# Altium PCB Version_2.PcbDoc
Units mm, origin at the board's own origin, x right, y up, seen from the top; angles counter-clockwise.
Board outline 53.21 x 55.37 mm, 4 copper layers (Top Layer, GND, POWER, Bottom Layer), stack 1.383 mm thick; 36 components, 29 nets, 151 pads, 15 vias.
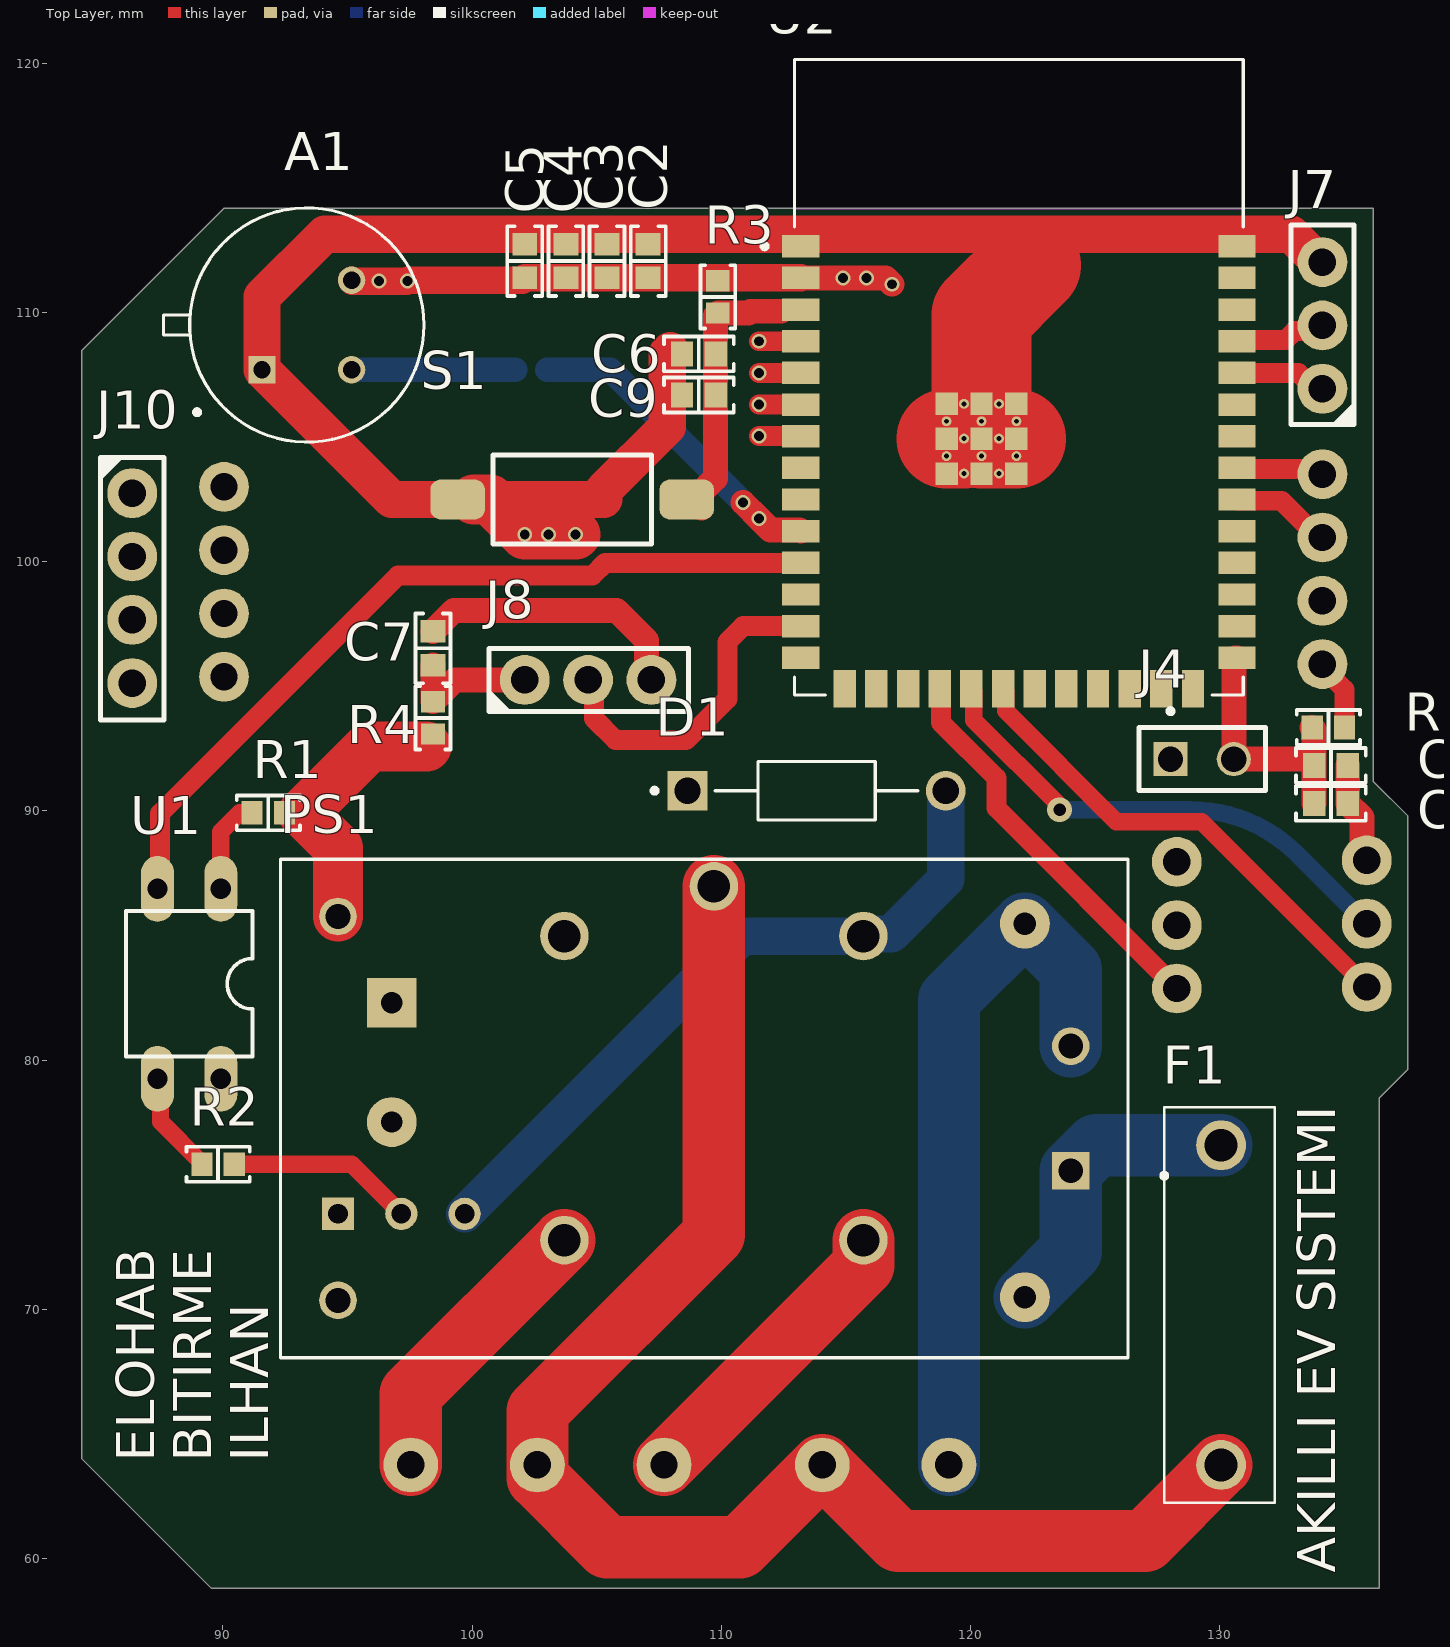
[diagram p0: Top Layer view]
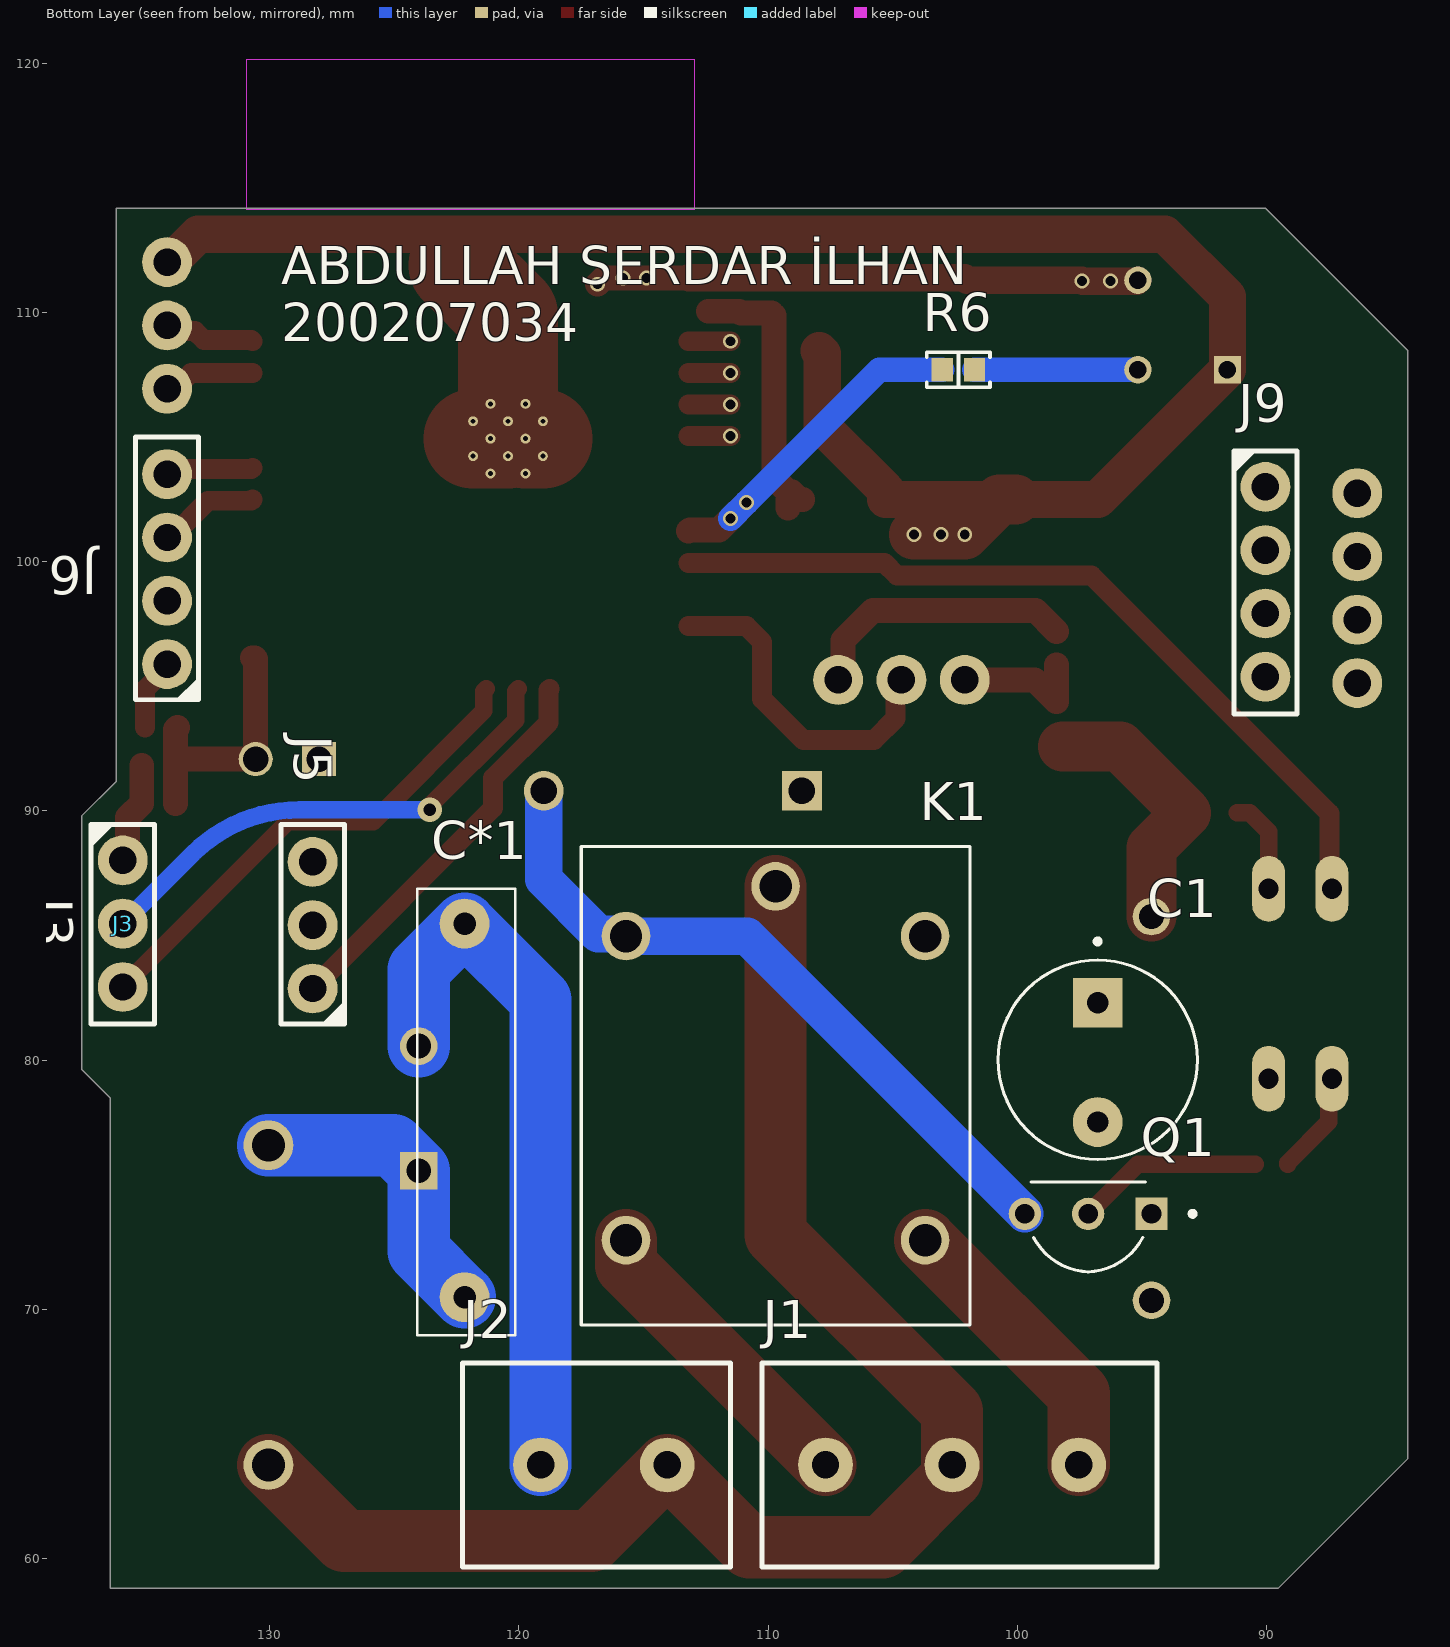
[diagram p1: Bottom Layer view, seen from below]
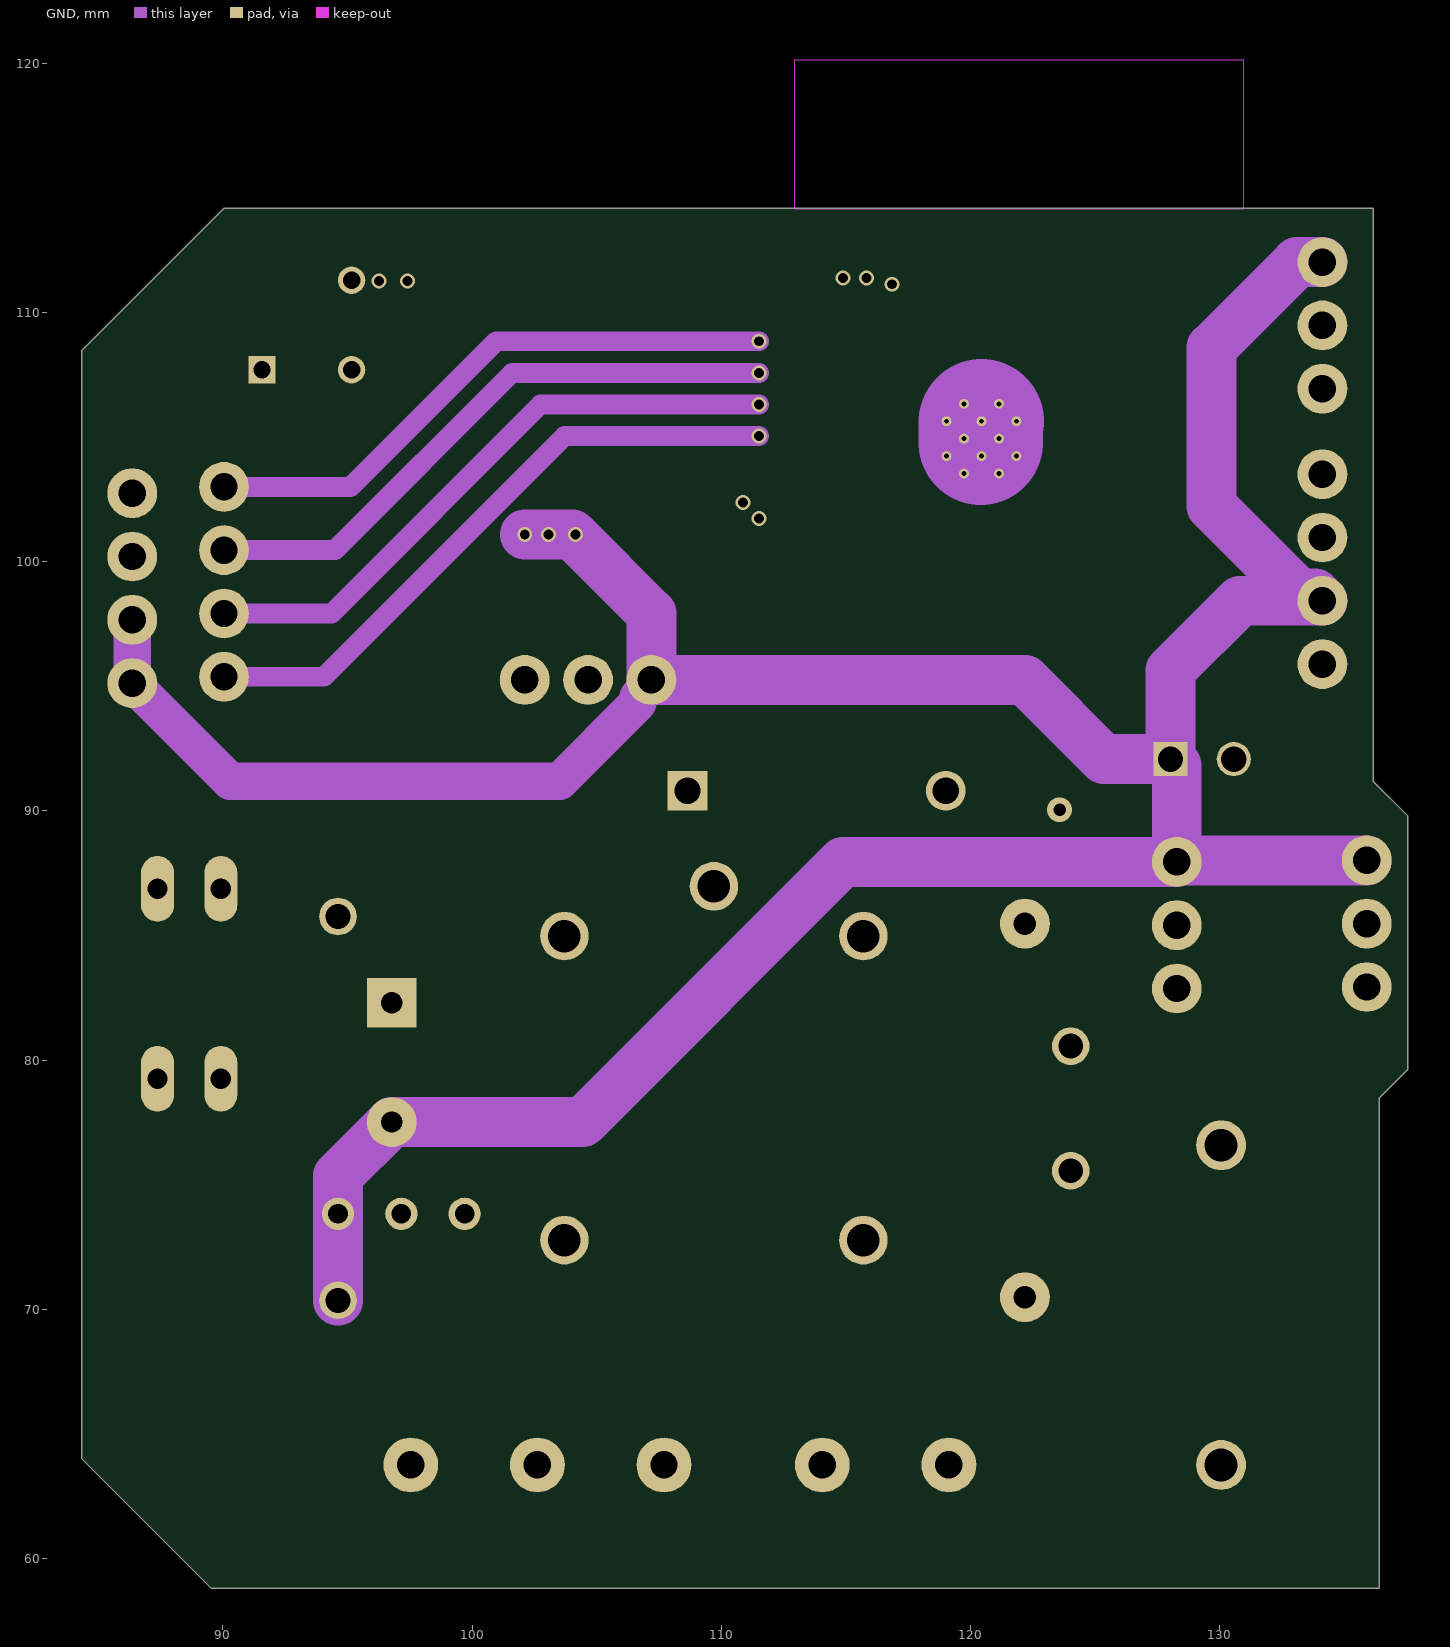
[diagram p2: GND]
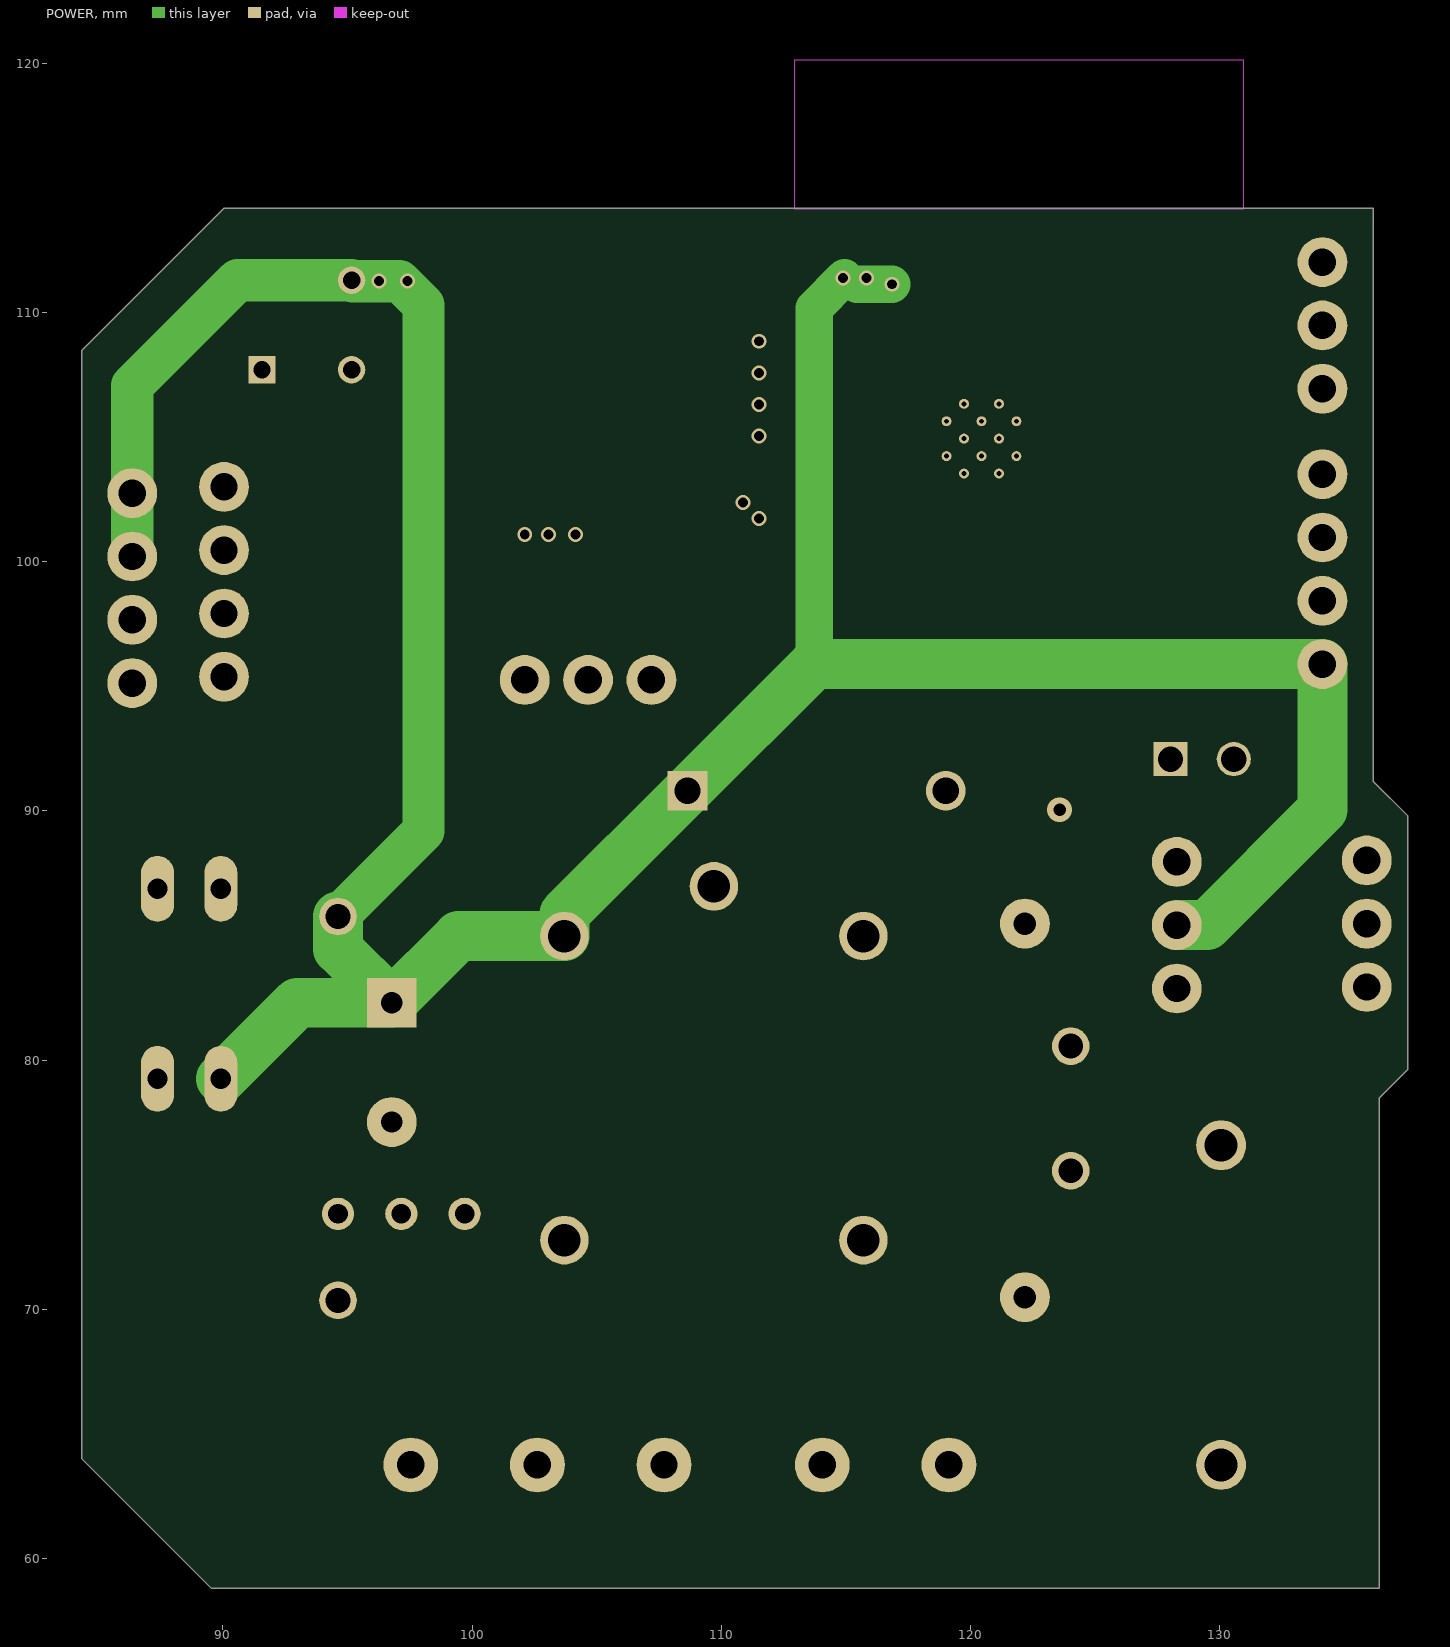
[diagram p3: POWER]
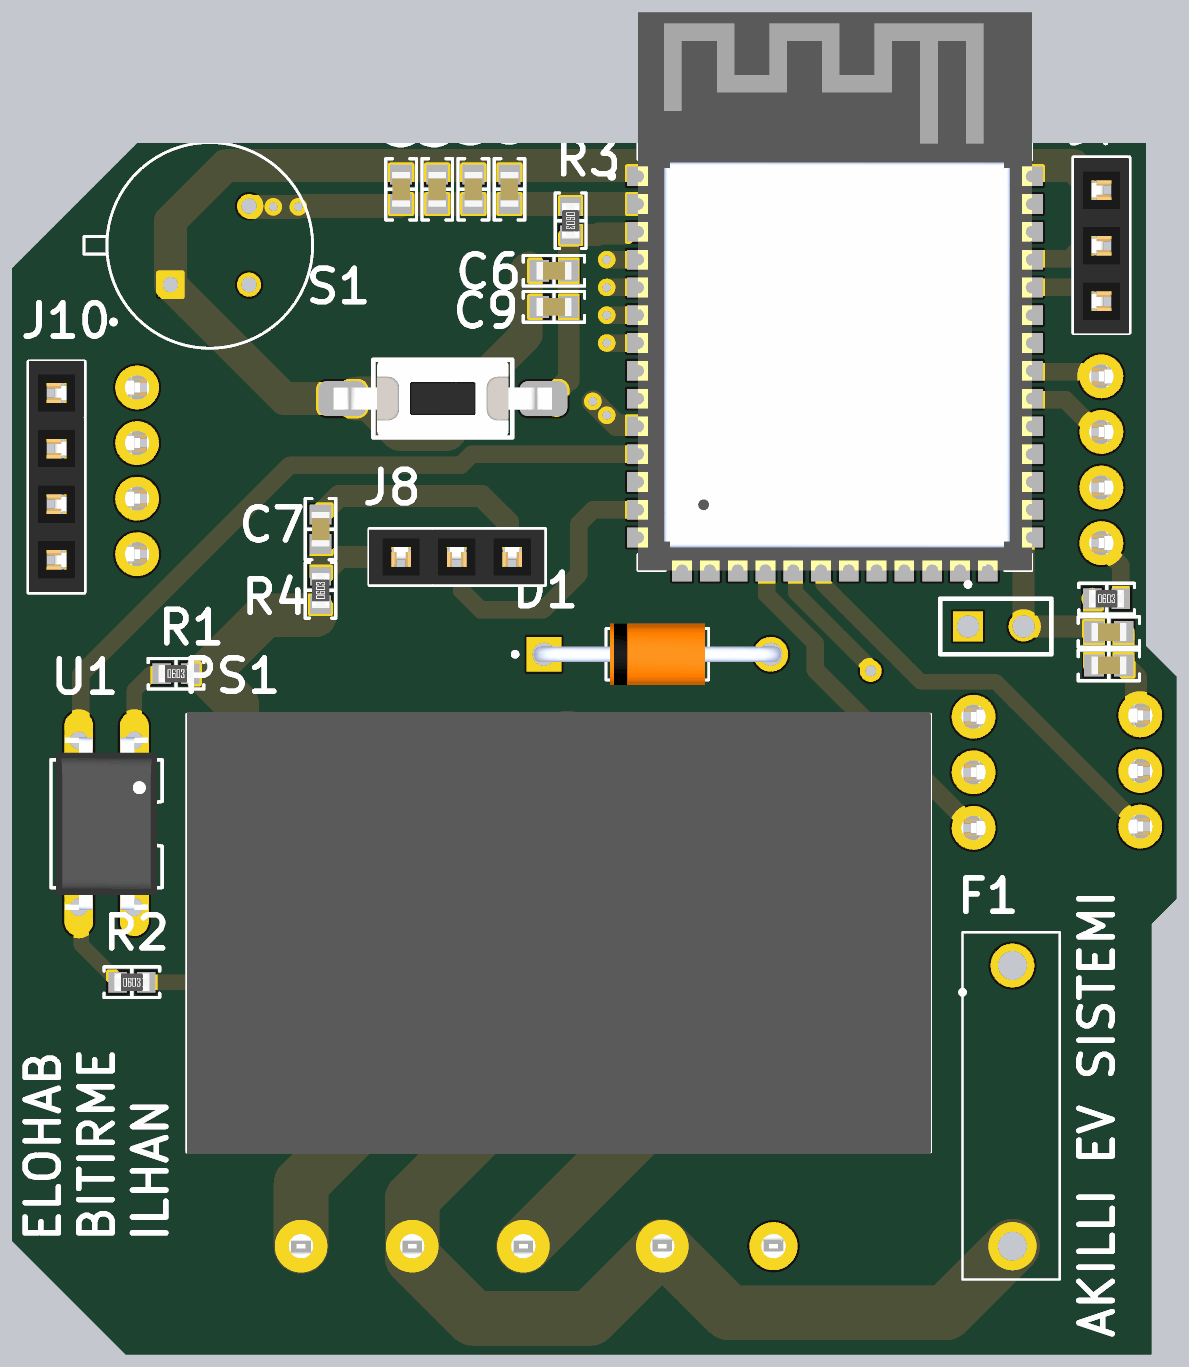
[diagram p4: 3D render of the assembled board from above, using the file's embedded part models]
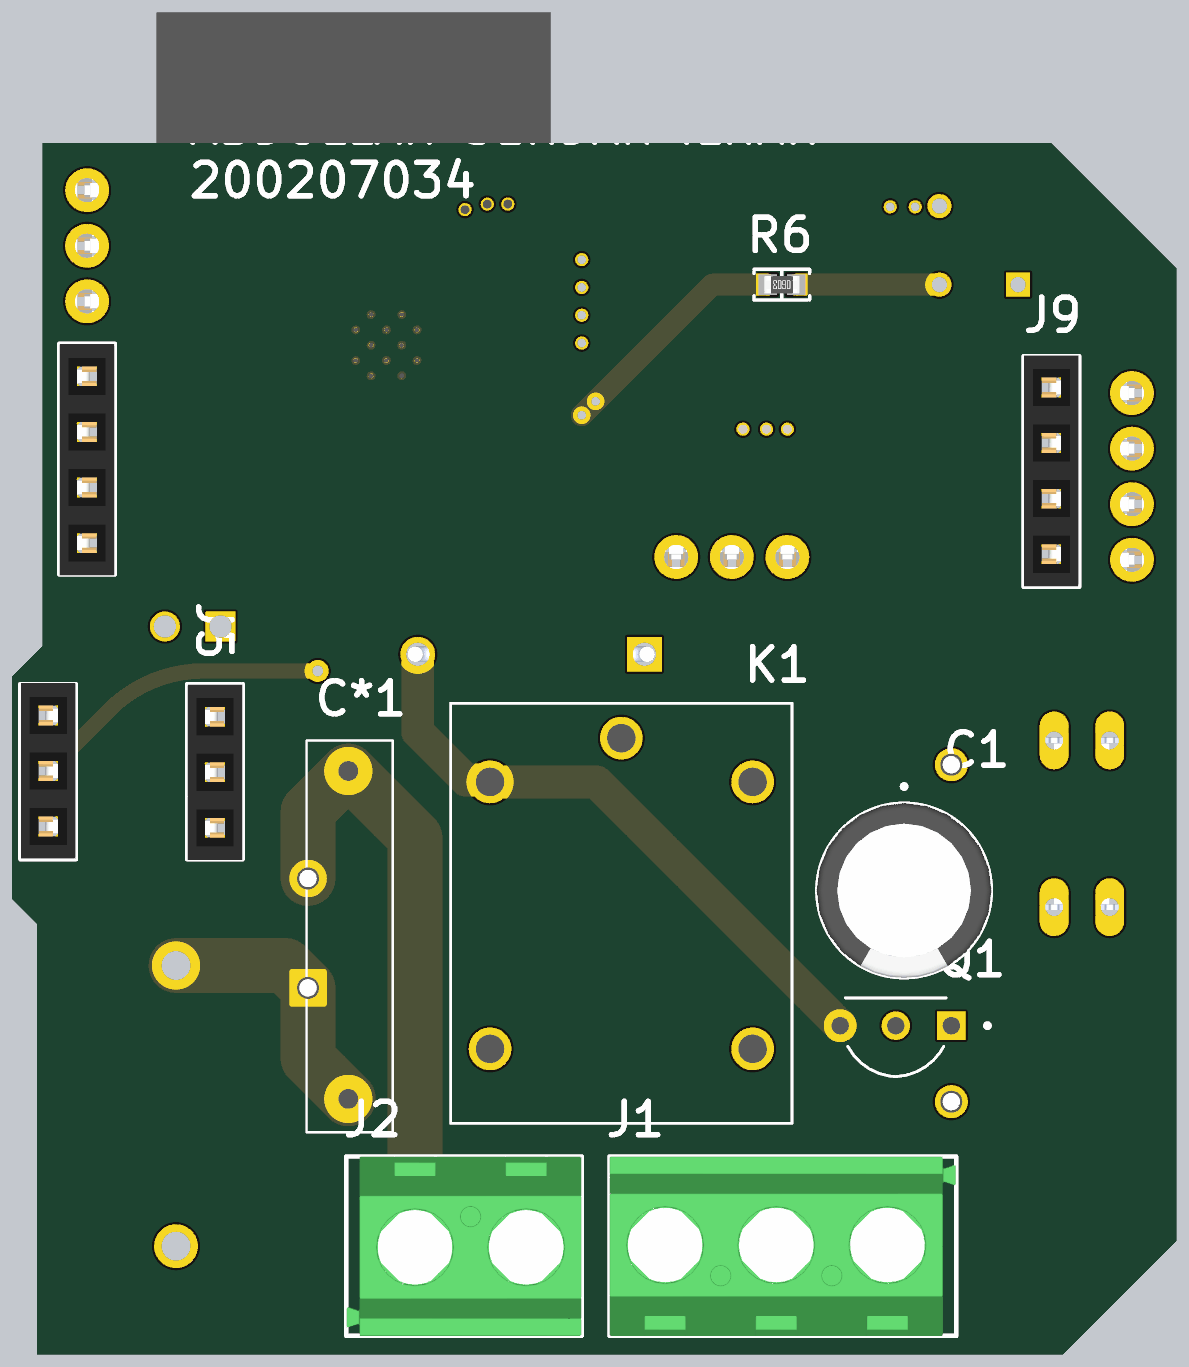
[diagram p5: 3D render of the assembled board from below, using the file's embedded part models]

## Layer stack, top to bottom
Top Solder: solder mask 0.0102, Solder Resist, Dk 3.5
Top Layer: signal copper 0.0356
Dielectric 2: prepreg 0.0711, PP-006, Dk 4.1
GND: signal copper 0.035
Dielectric 1: dielectric 1.1, FR-4, Dk 4.8
POWER: signal copper 0.035
Dielectric 3: prepreg 0.0711, PP-006, Dk 4.1
Bottom Layer: signal copper 0.0356
Bottom Solder: solder mask 0.0102, Solder Resist, Dk 3.5

## Board outline
84.328,64.008 84.328,99.695 84.328,108.458 90.043,114.173 136.144,114.173 136.144,91.186 137.541,89.789 137.541,79.629 136.398,78.486 136.398,58.801 89.535,58.801

## Design rules (kind name [scope] priority, off if disabled: settings)
Clearance [All] p1: gap=0.254 ignorepadtopadclearanceinfootprint=FALSE except(0: Arc-Hole Track-Hole SMDPad-Hole THPad-Hole Via-Hole Fill-Hole Poly-Hole Region-Hole Text-Hole)
PolygonConnect [All] p1: connectstyle=Relief reliefconductorwidth=0.254 reliefentries=4 polygonreliefangle="90 Angle" airgapwidth=0.254
RoutingVias [All] p1: holewidth=0.711 width=1.27 viastyle="Through Hole" minholewidth=0.711 minwidth=1.27 maxholewidth=0.711 maxwidth=1.27
SolderMaskExpansion [All] p1: expansion=0.102 istentingtop=FALSE
Width [All] p1: maxlimit=5 minlimit=0.254 preferedwidth=0.254 minimp=50.000000 maximp=50.000000 favimp=50.000000
30 further rules are at their usual default settings.

## Components (designator, comment, footprint, x,y, rotation, side; value= is the part's Value field where it differs from the comment)
A1 "IRA-S410ST01_1" "TO254P940H490-3 - duplicate" 93.363,109.492 r0 top
C1 "EEUFS2A330B" CAPPRD500W60D800H1150 96.774,80.01 r270 bottom
C2 "1 µF" "CAP 0603_1608" 107.061,112.054 r90 top
C3 "1 µF" "CAP 0603_1608" 105.41,112.054 r90 top
C4 "1 µF" "CAP 0603_1608" 103.759,112.054 r90 top
C5 "1 µF" "CAP 0603_1608" 102.108,112.054 r90 top
C6 "1 µF" "CAP 0603_1608" 109.093,108.331 r0 top
C7 "1 µF" "CAP 0603_1608" 98.425,96.52 r90 top
C8 "1 µF" "CAP 0603_1608" 134.453,91.821 r180 top
C9 "1 µF" "CAP 0603_1608" 109.093,106.68 r0 top
C10 "1 µF" "CAP 0603_1608" 134.453,90.297 r0 top
C*1 "Capacitance_Filter" Capacitance_Filter 122.301,78.486 r90 bottom
D1 "1N4001G" DIOAD1036W78L470D235 113.819,90.805 r0 top
F1 "Fuse 4x11" "Fuse 4x11" 129.921,69.088 r90 top
J1 "282837-3" "TE 282837-3" 102.616,63.754 r180 bottom
J2 "282837-2" "TE 282837-2" 116.586,63.754 r0 bottom
J3 "M20-7820342" "HARWIN M20-7820345" 135.89,85.471 r180 bottom
J4 "TSW-101-23-T-D" SAMTEC_TSW-101-23-T-D 128.016,92.075 r270 top
J5 "M20-7820342" "HARWIN M20-7820345" 128.27,85.411 r0 bottom
J6 "M20-7820442" "HARWIN M20-7820445" 134.112,99.695 r0 bottom
J7 "M20-7820342" "HARWIN M20-7820345" 134.112,109.474 r180 top
J8 "M20-7820342" "HARWIN M20-7820345" 104.648,95.25 r90 top
J9 "M20-7820442" "HARWIN M20-7820445" 90.043,99.187 r180 bottom
J10 "M20-7820442" "HARWIN M20-7820445" 86.36,98.933 r0 top
K1 "SRD-03VDC-SL-C" RELAY_SRD-03VDC-SL-C 109.697,78.971 r270 bottom
PS1 "HLK-PM03" CONV_HLK-PM03 109.315,78.058 r180 top
Q1 "2N2222A" TO92254P470H750-3 97.155,71.501 r0 bottom
R1 "1 kOhms" "RES 0603_1608" 91.821,89.916 r0 top
R2 "1 kOhms" "RES 0603_1608" 89.804,75.819 r0 top
R3 "10 kOhms" "RES 0603_1608" 109.855,110.617 r270 top
R4 "10 kOhms" "RES 0603_1608" 98.425,93.726 r90 top
R5 "10 kOhms" "RES 0603_1608" 134.351,93.345 r0 top
R6 "30 kOhms" "RES 0603_1608" 102.362,107.696 r0 bottom
S1 "FSMSM" "TE FSMSMTR" 104.013,102.489 r270 top
U1 "PC817X3NSZ9F" DIL04 88.646,83.058 r180 top
U2 "ESP32-S3-WROOM-1-N16R2" XCVR_ESP32-S3-WROOM-1-N16R2 121.933,107.389 r0 top

## Footprints (in the part's own frame and the unit in brackets; to place one, negate y for a bottom-side part, rotate by r counter-clockwise, add the part's x,y. Pads: shape width x height; smd on the part's side, far side on the other; paste and mask are expansions set on the pad)
"CAP 0603_1608" [mm] "Chip Capacitor, 2-Leads, Body 1.60x0.80mm, IPC Medium Density"
  rect 0.9x1 smd: 1(-0.675,0) 2(0.675,0)
  silkscreen extent -1.4,-0.7 1.4,0.7, body extent -0.8,-0.41 0.8,0.41, height 0.82
Capacitance_Filter [mm]
  round 2 hole 0.9: 1(-8.001,-0.127) 2(6.985,-0.127)
  silkscreen extent -9.53,-2.16 8.38,1.78
CAPPRD500W60D800H1150 [mm]
  round 2 hole 0.85: N(2.5,0)
  rect 2x2 hole 0.85: P(-2.286,0)
  silkscreen extent -4.85,-4 4,4, body extent -4,-4 4,4, height 11.5
CONV_HLK-PM03 [mm]
  rect 1.508x1.508 / inner round 1.508 / far side rect 1.508x1.508 hole 1: 1(-14.7,2.5)
  round 1.508 hole 1: 2(-14.7,-2.5) 3(14.7,7.7) 4(14.7,-7.7)
  silkscreen extent -18.55,-10 17,10, body extent -17,-10.1 17,10.1, height 20
DIL04 [mil]
  oval 52x104 hole 32: 1(-50,-150) 2(50,-150) 3(50,150) 4(-50,150)
  silkscreen extent -100,-115 100,115, body extent -91,-155 91,155, height 179
DIOAD1036W78L470D235 [mm]
  round 1.59 hole 1.06: A(5.18,0)
  rect 1.59x1.59 hole 1.06: C(-5.18,0)
  silkscreen extent -6.6,-1.17 4.07,1.17, body extent -5.65,-1.4 5.65,1.4, height 2.8
"Fuse 4x11" [mm]
  round 2 hole 1.32: 1(-5.334,-0.127) 2(7.493,-0.127)
  silkscreen extent -6.86,-2.29 9.02,2.16
"HARWIN M20-7820345" [mm] "2.54mm DIL PC TAIL PIN HEADER ASSEMBLY"
  round 2 hole 1.1: 1(0,2.54) 2(0,0) 3(0,-2.54)
  silkscreen extent -1.27,-4.03 1.27,4, body extent -1.25,-4.01 1.25,4.01, height 8.5
"HARWIN M20-7820445" [mm] "2.54mm DIL PC TAIL PIN HEADER ASSEMBLY"
  round 2 hole 1.1: 1(0,3.81) 2(0,1.27) 3(0,-1.27) 4(0,-3.81)
  silkscreen extent -1.27,-5.3 1.27,5.27, body extent -1.25,-5.28 1.25,5.28, height 8.5
RELAY_SRD-03VDC-SL-C [mm]
  round 1.95 hole 1.3: COIL1(-6,6) COIL2(-6,-6) COM(-8,0) NC(6.2,6) NO(6.2,-6)
  silkscreen extent -9.6,-7.8 9.6,7.8
"RES 0603_1608" [mm] "Chip Resistor, 2-Leads, Body 1.60x0.80mm, IPC Medium Density"
  rect 0.85x0.95 smd: 1(-0.65,0) 2(0.65,0)
  silkscreen extent -1.27,-0.7 1.27,0.7, body extent -0.8,-0.4 0.8,0.4, height 0.45
SAMTEC_TSW-101-23-T-D [mm]
  rect 1.37x1.37 hole 1.02: 01(0,0)
  round 1.37 hole 1.02: 02(0,2.54)
  silkscreen extent -2.02,-1.27 1.27,3.81
"TE 282837-2" [mm] "Wire to Board Terminal Block Horizontal with Board, 2 Postions, Body 10.76x8.2 mm, Pitch 5.08mm"
  round 2.2 hole 1.1: 1(-2.54,0) 2(2.54,0)
  silkscreen extent -5.08,-4.1 5.68,4.1, body extent -5.08,-4.1 5.68,4.1, height 10.3
"TE 282837-3" [mm] "Wire to Board Terminal Block Horizontal with Board, 3 Postions, Body 15.84x8.2mm, Pitch 5.08mm"
  round 2.2 hole 1.1: 1(-5.08,0) 2(0,0) 3(5.08,0)
  silkscreen extent -7.62,-4.1 8.22,4.1, body extent -7.62,-4.1 8.22,4.1, height 10.3
"TE FSMSMTR" [mm]
  rrect50% 1.6x2.19 smd: 1(0,4.595) 2(0,-4.595)
  silkscreen extent -1.78,-3.18 1.78,3.18, body extent -1.75,-4.98 1.75,4.98, height 4.42
"TO254P940H490-3 - duplicate" [mm]
  round 1.1 hole 0.7: 1(1.796,1.796) 2(1.796,-1.796)
  rect 1.1x1.1 hole 0.7: 3(-1.796,-1.796)
  silkscreen extent -5.75,-4.7 4.7,4.7
TO92254P470H750-3 [mm]
  rect 1.298x1.298 / inner round 1.298 / far side rect 1.298x1.298 hole 0.79: 1(-2.54,-2.33)
  round 1.298 hole 0.79: 2(0,-2.33) 3(2.54,-2.33)
  silkscreen extent -4.29,-3.6 2.3,0
XCVR_ESP32-S3-WROOM-1-N16R2 [mm]
  rect 1.5x0.9 smd: 2(-8.75,3.99) 3(-8.75,2.72) 4(-8.75,1.45) 5(-8.75,0.18) 6(-8.75,-1.09) 7(-8.75,-2.36) 8(-8.75,-3.63) 9(-8.75,-4.9) 10(-8.75,-6.17) 11(-8.75,-7.44) 12(-8.75,-8.71) 13(-8.75,-9.98) 14(-8.75,-11.25) 27(8.75,-11.25) 28(8.75,-9.98) 29(8.75,-8.71) 30(8.75,-7.44) 31(8.75,-6.17) 32(8.75,-4.9) 33(8.75,-3.63) 34(8.75,-2.36) 35(8.75,-1.09) 36(8.75,0.18) 37(8.75,1.45) 38(8.75,2.72) 39(8.75,3.99) GND(-8.75,5.26) GND(8.75,5.26)
  rect 0.9x1.5 smd: 15(-6.985,-12.5) 16(-5.715,-12.5) 17(-4.445,-12.5) 18(-3.175,-12.5) 19(-1.905,-12.5) 20(-0.635,-12.5) 21(0.635,-12.5) 22(1.905,-12.5) 23(3.175,-12.5) 24(4.445,-12.5) 25(5.715,-12.5) 26(6.985,-12.5)
  round 0.4 hole 0.2 mask+0: 41_10(-1.5,-1.76) 41_11(-2.9,-1.76) 41_12(-0.1,-1.76) 41_13(-2.9,-3.16) 41_14(-1.5,-3.16) 41_15(-0.1,-3.16) 41_16(-2.2,-1.06) 41_17(-0.8,-1.06) 41_18(-2.2,-2.46) 41_19(-0.8,-2.46) 41_20(-2.2,-3.86) 41_21(-0.8,-3.86)
  rect 0.9x0.9 smd: GND(-2.9,-3.86) GND(-2.9,-2.46) GND(-2.9,-1.06) GND(-1.5,-3.86) GND(-1.5,-2.46) GND(-1.5,-1.06) GND(-0.1,-3.86) GND(-0.1,-2.46) GND(-0.1,-1.06)
  Keep-Out Layer region: 9,6.75 -9,6.75 -9,12.75 9,12.75
  Keep-Out Layer region: 9,6.75 -9,6.75 -9,12.75 9,12.75
  silkscreen extent -10.3,-12.75 9,12.75, body extent -9,-12.75 9,12.75, height 3.25

## Part data
A1: "Sensor PIR (Passive Infrared) Motion Sensing Radial, Metal Can, Lensed - 3 Lead", Package="Radial-3 Murata", Arrow_Electronics-Purchase-URL=https://snapeda.com/shop?store=Arrow+Electronics&id=4970504, Availability=Bad, DigiKey-Purchase-URL=https://snapeda.com/shop?store=DigiKey&id=4970504, MF=Murata, Mouser-Purchase-URL=https://snapeda.com/shop?store=Mouser&id=4970504, MP=IRA-S410ST01, Price=None, SnapEDA_Link=https://www.snapeda.com/parts/IRA-S410ST01/Murata/view-part/4970504/?ref=snap
C1: "CAP ALUM 33UF 20% 100V THRU HOLE", Package="RADIAL-2 Panasonic", Availability="In Stock", Check_prices=https://www.snapeda.com/parts/EEUFS2A330B/Panasonic/view-part/5795625/?ref=eda, MF=Panasonic, MP=EEUFS2A330B, Price=None, SnapEDA_Link=https://www.snapeda.com/parts/EEUFS2A330B/Panasonic/view-part/5795625/?ref=snap
C2 C4 C9 C10: library part C0603C105K4RACAUTO, "CAP CER 1UF 16V X7R 0603", Capacitance=0.1uF, Device Package="0603 (1608 Metric)", Manufacturer=KEMET, Operating Temperature="-55°C ~ 125°C", Ratings=AEC-Q200, Supplier Part Number 1=399-17704-1-ND, Temperature Coefficient=X7R, Tolerance=±10%, Voltage - Rated=16V, Applications="Automotive, Bypass, Decoupling", ComponentLink1Description=Datasheet, ComponentLink1URL=https://api.kemet.com/component-edge/download/datasheet/C0603C105K4RACAUTO.pdf, ComponentLink2Description="DigiKey Link", ComponentLink2URL=https://www.digikey.com/en/products/detail/kemet/C0603C105K4RACAUTO/8635831, LastUpdated="9.02.2024 20:10:30", Lifecycle Status=Active, Minimum Order=1, Mounting Type="Surface Mount, MLCC", Package / Case="0603 (1608 Metric)", Packaging=TapeAndReel, Part Number=C0603C105K4RACAUTO, Part Status=Active, partid=2179, Price=0.01, Series="SMD Auto X7R", Size / Dimension="0.063\" L x 0.031\" W (1.60mm x 0.80mm)", Supplier 1=DigiKey, Thickness (Max)="0.037\" (0.95mm)"
C3 C5: library part C0603C105K4RACAUTO, "CAP CER 1UF 16V X7R 0603", Capacitance=22uF, Device Package="0603 (1608 Metric)", Manufacturer=KEMET, Operating Temperature="-55°C ~ 125°C", Ratings=AEC-Q200, Supplier Part Number 1=399-17704-1-ND, Temperature Coefficient=X7R, Tolerance=±10%, Voltage - Rated=16V, Applications="Automotive, Bypass, Decoupling", ComponentLink1Description=Datasheet, ComponentLink1URL=https://api.kemet.com/component-edge/download/datasheet/C0603C105K4RACAUTO.pdf, ComponentLink2Description="DigiKey Link", ComponentLink2URL=https://www.digikey.com/en/products/detail/kemet/C0603C105K4RACAUTO/8635831, LastUpdated="9.02.2024 20:10:30", Lifecycle Status=Active, Minimum Order=1, Mounting Type="Surface Mount, MLCC", Package / Case="0603 (1608 Metric)", Packaging=TapeAndReel, Part Number=C0603C105K4RACAUTO, Part Status=Active, partid=2179, Price=0.01, Series="SMD Auto X7R", Size / Dimension="0.063\" L x 0.031\" W (1.60mm x 0.80mm)", Supplier 1=DigiKey, Thickness (Max)="0.037\" (0.95mm)"
C6 C7 C8: library part C0603C105K4RACAUTO, "CAP CER 1UF 16V X7R 0603", Capacitance=1uF, Device Package="0603 (1608 Metric)", Manufacturer=KEMET, Operating Temperature="-55°C ~ 125°C", Ratings=AEC-Q200, Supplier Part Number 1=399-17704-1-ND, Temperature Coefficient=X7R, Tolerance=±10%, Voltage - Rated=16V, Applications="Automotive, Bypass, Decoupling", ComponentLink1Description=Datasheet, ComponentLink1URL=https://api.kemet.com/component-edge/download/datasheet/C0603C105K4RACAUTO.pdf, ComponentLink2Description="DigiKey Link", ComponentLink2URL=https://www.digikey.com/en/products/detail/kemet/C0603C105K4RACAUTO/8635831, LastUpdated="9.02.2024 20:10:30", Lifecycle Status=Active, Minimum Order=1, Mounting Type="Surface Mount, MLCC", Package / Case="0603 (1608 Metric)", Packaging=TapeAndReel, Part Number=C0603C105K4RACAUTO, Part Status=Active, partid=2179, Price=0.01, Series="SMD Auto X7R", Size / Dimension="0.063\" L x 0.031\" W (1.60mm x 0.80mm)", Supplier 1=DigiKey, Thickness (Max)="0.037\" (0.95mm)"
D1: "1A, 50V, Standard Recovery Rectifier", Package="DO-41-2 Taiwan Semiconductor", Availability="In Stock", Check_prices=https://www.snapeda.com/parts/1N4001G/Taiwan+Semiconductor/view-part/?ref=eda, MF="Taiwan Semiconductor", MP=1N4001G, Price=None, Purchase-URL=https://pricing.snapeda.com/search/part/1N4001G/?ref=eda, SnapEDA_Link=https://www.snapeda.com/parts/1N4001G/Taiwan+Semiconductor/view-part/?ref=snap
J1: "TERM BLK 3P SIDE ENT 5.08MM PCB", Color=Green, Current="13.5 A", Manufacturer="TE Connectivity AMP Connectors", Supplier Part Number 1=A113321-ND, Voltage="300 V", ComponentLink1Description=Datasheet, ComponentLink1URL=https://www.te.com/commerce/DocumentDelivery/DDEController?Action=srchrtrv&DocNm=282837&DocType=Customer+Drawing&DocLang=English, ComponentLink2Description="DigiKey Link", ComponentLink2URL=https://www.digikey.com/en/products/detail/te-connectivity-amp-connectors/282837-3/2187974, Features="Interlocking (Side)", LastUpdated="21.06.2022 15:00:39", Lifecycle Status=Active, Mating Orientation="Horizontal with Board", Minimum Order=1, Mounting Type="Through Hole", Number of Levels=1, Packaging=Tray, Part Number=282837-3, Part Status=Active, Pitch="0.200\" (5.08mm)", Positions Per Level=3, Price=0.47, Series=Buchanan, Supplier 1=DigiKey, Wire Gauge="16-28 AWG", Wire Termination="Screw - Rising Cage Clamp"
J2: "TERM BLK 2P SIDE ENT 5.08MM PCB", Color=Green, Current="13.5 A", Manufacturer="TE Connectivity AMP Connectors", Supplier Part Number 1=A113320-ND, Voltage="300 V", ComponentLink1Description=Datasheet, ComponentLink1URL=https://www.te.com/commerce/DocumentDelivery/DDEController?Action=srchrtrv&DocNm=282837&DocType=Customer+Drawing&DocLang=English, ComponentLink2Description="DigiKey Link", ComponentLink2URL=https://www.digikey.com/en/products/detail/te-connectivity-amp-connectors/282837-2/2187973, Features="Interlocking (Side)", LastUpdated="21.06.2022 15:00:23", Lifecycle Status=Active, Mating Orientation="Horizontal with Board", Minimum Order=1, Mounting Type="Through Hole", Number of Levels=1, Packaging=Tray, Part Number=282837-2, Part Status=Active, Pitch="0.200\" (5.08mm)", Positions Per Level=2, Price=0.31, Series=Buchanan, Supplier 1=DigiKey, Wire Gauge="16-28 AWG", Wire Termination="Screw - Rising Cage Clamp"
J3 J5 J7 J8: "CONN RCPT 3POS 0.1 GOLD PCB", Current Rating (Amps)=3A, Manufacturer="Harwin Inc.", Material Flammability Rating="UL94 V-0", Operating Temperature="-40°C ~ 105°C", Supplier Part Number 1=952-1783-ND, Insulation Color=Black, ComponentLink1Description=Datasheet, ComponentLink1URL=https://cdn.harwin.com/pdfs/Harwin_PC_Connectors_M20.pdf, ComponentLink2Description="DigiKey Link", ComponentLink2URL=https://www.digikey.com/en/products/detail/harwin-inc/M20-7820342/3727752, Connector Type=Receptacle, Contact Finish - Mating=Gold, Contact Finish - Post=Tin, Contact Finish Thickness - Mating=Flash, Contact Length - Post="0.118\" (3.00mm)", Contact Type="Female Socket", Fastening Type=Push-Pull, LastUpdated="21.09.2022 18:55:13", Lifecycle Status=Active, Mated Stacking Heights="11.04mm, 12.63mm", Minimum Order=1, Mounting Type="Through Hole", Number of Positions=3, Number of Positions Loaded=All, Number of Rows=1, Packaging=Tube, Part Number=M20-7820342, Part Status=Active, Pitch - Mating="0.100\" (2.54mm)", Price=0.42, Series=M20, Style="Board to Board or Cable", Supplier 1=DigiKey, Termination=Solder, Insulation Height="0.335\" (8.51mm)"
J4: "TSW Series .100 Terminal Strip", Package=None, Availability=Bad, MF=Samtec, MP=TSW-101-23-T-D, Price=None, SnapEDA_Link=https://www.snapeda.com/parts/TSW-101-23-T-D/Samtec/view-part/3473100/?ref=snap
J6 J9 J10: "CONN RCPT 4POS 0.1 GOLD PCB", Current Rating (Amps)=3A, Manufacturer="Harwin Inc.", Material Flammability Rating="UL94 V-0", Operating Temperature="-40°C ~ 105°C", Supplier Part Number 1=952-1791-ND, Insulation Color=Black, ComponentLink1Description=Datasheet, ComponentLink1URL=https://cdn.harwin.com/pdfs/Harwin_PC_Connectors_M20.pdf, ComponentLink2Description="DigiKey Link", ComponentLink2URL=https://www.digikey.com/en/products/detail/harwin-inc/M20-7820442/3727760, Connector Type=Receptacle, Contact Finish - Mating=Gold, Contact Finish - Post=Tin, Contact Finish Thickness - Mating=Flash, Contact Length - Post="0.118\" (3.00mm)", Contact Type="Female Socket", Fastening Type=Push-Pull, LastUpdated="21.09.2022 18:57:11", Lifecycle Status=Active, Mated Stacking Heights="11.04mm, 12.63mm", Minimum Order=1, Mounting Type="Through Hole", Number of Positions=4, Number of Positions Loaded=All, Number of Rows=1, Packaging=Tube, Part Number=M20-7820442, Part Status=Active, Pitch - Mating="0.100\" (2.54mm)", Price=0.45, Series=M20, Style="Board to Board or Cable", Supplier 1=DigiKey, Termination=Solder, Insulation Height="0.335\" (8.51mm)"
K1: "Relays General Purpose Non Latching 3VDC SPDT 10A (250VAC) Max 5PIN", Package=Package, Availability="Not in stock", Check_prices=https://www.snapeda.com/parts/SRD-03VDC-SL-C/Songle+Relay/view-part/?ref=eda, MF="Songle Relay", MP=SRD-03VDC-SL-C, Price=None, SnapEDA_Link=https://www.snapeda.com/parts/SRD-03VDC-SL-C/Songle+Relay/view-part/?ref=snap
PS1: Package=Package, Availability="Not in stock", Check_prices=https://www.snapeda.com/parts/HLK-PM03/Hi-link/view-part/?ref=eda, MF=Hi-link, MP=HLK-PM03, Price=None, SnapEDA_Link=https://www.snapeda.com/parts/HLK-PM03/Hi-link/view-part/?ref=snap
Q1: "Bipolar (BJT) Transistor NPN 40 V 600 mA 250MHz 625 mW Through Hole TO-92", Package="TO-92-3 Diotec", Availability="In Stock", Check_prices=https://www.snapeda.com/parts/2N2222A/Diotec/view-part/?ref=eda, MF="Diotec Semiconductor", MP=2N2222A, Price=None, Purchase-URL=https://pricing.snapeda.com/search/part/2N2222A/?ref=eda, SnapEDA_Link=https://www.snapeda.com/parts/2N2222A/Diotec/view-part/?ref=snap
R1 R2 R3 R4 R5: library part ERJ-PB3D4642V, "RES SMD 46.4K OHM 0.5% 1/5W 0603", Device Package="0603 (1608 Metric)", Manufacturer="Panasonic Electronic Components", Operating Temperature="-55°C ~ 155°C", Power (Watts)="0.2W, 1/5W", Ratings=AEC-Q200, Resistance="46.4 kOhms", Supplier Device Package=0603, Supplier Part Number 1=P20472CT-ND, Temperature Coefficient=±50ppm/°C, Tolerance=±0.5%, ComponentLink1Description=Datasheet, ComponentLink1URL=https://industrial.panasonic.com/cdbs/www-data/pdf/RDM0000/AOA0000C328.pdf, ComponentLink2Description="DigiKey Link", ComponentLink2URL=https://www.digikey.com/en/products/detail/panasonic-electronic-components/ERJ-PB3D4642V/6213255, Composition="Thick Film", Features="Automotive AEC-Q200, Pulse Withstanding", Height - Seated (Max)="0.022\" (0.55mm)", LastUpdated="9.02.2024 20:43:36", Lifecycle Status=Active, Minimum Order=1, Number of Terminations=2, Package / Case="0603 (1608 Metric)", Packaging=TapeAndReel, Part Number=ERJ-PB3D4642V, Part Status=Active, partid=5056, Price=0.02, Series=ERJ-PB3, Size / Dimension="0.063\" L x 0.031\" W (1.60mm x 0.80mm)", Supplier 1=DigiKey
R6: library part RNCS0603BKE10K0, "RES 10K OHM 0.1% 1/16W 0603", Device Package="0603 (1608 Metric)", Manufacturer="Stackpole Electronics Inc", Operating Temperature="-55°C ~ 155°C", Power (Watts)="0.063W, 1/16W", Ratings=AEC-Q200, Resistance="10 kOhms", Supplier Device Package=0603, Supplier Part Number 1=RNCS0603BKE10K0CT-ND, Temperature Coefficient=±25ppm/°C, Tolerance=±0.1%, ComponentLink1Description=Datasheet, ComponentLink1URL=https://www.seielect.com/catalog/sei-rncs_rnch.pdf, ComponentLink2Description="DigiKey Link", ComponentLink2URL=https://www.digikey.com/en/products/detail/stackpole-electronics-inc/RNCS0603BKE10K0/1708836, Composition="Thin Film", Features="Anti-Corrosive, Automotive AEC-Q200, Moisture Resistant", Height - Seated (Max)="0.022\" (0.55mm)", LastUpdated="9.02.2024 20:43:37", Lifecycle Status=Active, Minimum Order=1, Number of Terminations=2, Package / Case="0603 (1608 Metric)", Packaging=TapeAndReel, Part Number=RNCS0603BKE10K0, Part Status=Active, partid=4838, Price=0.06, Series=RNCS, Size / Dimension="0.061\" L x 0.031\" W (1.55mm x 0.80mm)", Supplier 1=DigiKey
S1: "SWITCH TACTILE SPST-NO 0.05A 24V", Contact Rating @ Voltage="0.05A @ 24VDC", Manufacturer="TE Connectivity ALCOSWITCH Switches", Operating Force=180gf, Operating Temperature="-35°C ~ 85°C", Supplier Part Number 1=450-1140-ND, Actuator Height off PCB, Vertical=4.57mm, Actuator Orientation="Top Actuated", Actuator Type=Standard, Circuit=SPST-NO, ComponentLink1Description=Datasheet, ComponentLink1URL=https://www.te.com/commerce/DocumentDelivery/DDEController?Action=srchrtrv&DocNm=1437566-3&DocType=Customer+Drawing&DocLang=English, ComponentLink2Description="DigiKey Link", ComponentLink2URL=https://www.digikey.com/en/products/detail/te-connectivity-alcoswitch-switches/FSMSM/525812, LastUpdated="3.06.2024 20:19:35", Lifecycle Status=Active, Minimum Order=1, Mounting Type="Surface Mount", Outline="6.00mm x 3.50mm", Packaging=Bulk, Part Number=FSMSM, Part Status=Active, Price=0.17, Series=FSMSM, Supplier 1=DigiKey, Switch Function=Off-Mom, Termination Style="Gull Wing", Illumination=Non-Illuminated
U1: "Optoisolator Transistor Output 5000Vrms 1 Channel 4-DIP", Package="DIP-4 Sharp Microelectronics", Check_prices=https://www.snapeda.com/parts/PC817X3NSZ9F/Sharp+Microelectronics/view-part/?ref=eda, MF="Sharp Microelectronics", MP=PC817X3NSZ9F, SnapEDA_Link=https://www.snapeda.com/parts/PC817X3NSZ9F/Sharp+Microelectronics/view-part/?ref=snap
U2: "Bluetooth, WiFi 802.11b/g/n, Bluetooth v5.0 Transceiver Module 2.4GHz PCB Trace Surface Mount", Package="NON STANDARD Espressif Systems", Check_prices=https://www.snapeda.com/parts/ESP32S3WROOM1N16R2/Espressif+Systems/view-part/?ref=eda, MF="Espressif Systems", MP=ESP32S3WROOM1N16R2, SnapEDA_Link=https://www.snapeda.com/parts/ESP32S3WROOM1N16R2/Espressif+Systems/view-part/?ref=snap

## Via types
v1: diameter 0.6, hole 0.4, Top Layer to Bottom Layer, 14 vias
v2: diameter 1, hole 0.5, Top Layer to Bottom Layer, 1 vias

## Nets (pads, with @x,y where several pads share a name; then routed paths per layer and width w, separated by ;. In a path a pad name is that pad's centre, name@x,y a point inside that pad or via, vN(x,y) a via of type N, cw(c..) or ccw(c..) an arc to the next point about the centre after c; other vN are vias at no path point)
+3.3V: A1.1 C1.P C2.1 C3.1 C4.1 C5.1 D1.C J5.2 J6.1 J10.1 J10.2 K1.COIL1 PS1.4 R1.2 R3.1 R4.1 R5.2 U1.4 U2.2 | length 169.2
  Top Layer w0.8: J6.1 134.112,95.751 135.001,94.862 R5.2
  Top Layer w1: U2.2 116.586,111.379 v1(116.84,111.125)
  Top Layer w1.1: A1.1 95.195,111.252 97.373,111.252 97.409,111.288 102.017,111.288 C5.1 C4.1 C3.1 C2.1 U2.2
  Top Layer w2: PS1.4 94.615,88.519 93.218,89.916 95.885,92.583 98.171,92.583
  POWER w1.5: 113.719,95.885 113.719,110.163 v1@114.935,111.379 ; 115.443,111.125 v1(116.84,111.125)
  POWER w1.7: J10.2 J10.1 86.36,107.061 90.587,111.288 A1.1 95.195,111.252 97.084,111.252 98.044,110.292 98.044,89.187 PS1.4
  POWER w2: U1.4 89.935,79.248 92.983,82.296 C1.P ; PS1.4 94.615,84.455 C1.P ; J5.2 129.48,85.411 134.112,90.043 J6.1 113.719,95.885 D1.C 103.697,85.863 K1.COIL1 99.449,84.971 C1.P
  other v1: 96.266,111.252 97.409,111.252 114.884,111.379 115.824,111.379
EN: C6.2 C9.2 R3.2 S1.1 U2.3 | length 11.5
  Top Layer w0.8: S1.1 S1.1@109.008,102.889
  Top Layer w1: S1.1 108.903,102.489 109.743,103.329 109.768,103.329 C9.2 C6.2 R3.2@109.768,109.88 ; S1.1@109.203,102.154 S1.1@109.203,102.449 ; R3.2 111.087,109.967 111.163,110.043 112.395,110.043
FAZ: F1.1 J1.2 J2.1 K1.COM | length 59.1
  Top Layer w2.5: K1.COM 109.697,72.994 102.616,65.913 102.616,63.246 105.41,60.452 110.744,60.452 J2.1 117.094,60.706 127,60.706 F1.1
GND: A1.3 C1.N C2.2 C3.2 C4.2 C5.2 C6.1 C7.2 C8.1 C9.1 C10.2 J3.1 J4.01 J5.3 J6.2 J7.3 J8.3 J10.3 J10.4 PS1.3 Q1.1 S1.2 U2.41_10 U2.41_11 U2.41_12 U2.41_13 U2.41_14 U2.41_15 U2.41_16 U2.41_17 U2.41_18 U2.41_19 U2.41_20 U2.41_21 U2.GND | length 241
  Top Layer w1: C7.2 99.274,98.044 105.791,98.044 106.997,96.838 106.997,95.441 J8.3 ; S1.2 S1.2@100.076,102.489 ; C8.1 C10.2 135.699,89.726 135.699,88.202 J3.1
  Top Layer w1.5: S1.2 96.774,102.489 A1.3 91.567,110.617 94.085,113.135 132.856,113.135 133.977,112.014 J7.3 ; 100.711,102.489 105.283,102.489 105.283,102.87 107.823,105.41 107.823,108.331 107.95,108.458
  Top Layer w2: S1.2@100.076,102.489 100.711,102.489 v1(102.108,101.092) v1(103.06,101.092) v1(104.14,101.092)
  Top Layer w4: U2.GND@119.033,104.929 U2.41_18 ; U2.GND@120.433,104.929 U2.GND@121.833,104.929 ; U2.GND@120.433,106.329 120.433,109.89 122.428,111.885
  GND w1.5: J10.3 J10.4 90.297,91.186 103.505,91.186 106.652,94.333 106.652,94.579 107.188,95.115 J8.3
  GND w2: PS1.3 Q1.1 94.615,75.351 C1.N 104.434,77.51 114.875,87.951 J5.3 ; v1(102.108,101.092) v1(103.06,101.092) 104.013,101.092 107.188,97.917 J8.3 122.174,95.25 125.349,92.075 J4.01 ; J7.3 133.096,112.014 129.667,108.585 129.667,102.222 133.178,98.711 133.826,98.711 J6.2 130.81,98.425 128.016,95.631 J4.01 ; J3.1 128.33,88.011 J5.3 ; J4.01 128.27,91.821 J5.3
  GND w5: 120.396,104.775 120.396,105.156 ; U2.41_10@120.396,105.592 U2.41_10
IO0: C8.2 C10.1 J4.02 R5.1 U2.27 | length 10.6
  Top Layer w1: U2.27 130.606,96.139 130.556,96.089 J4.02 133.524,92.075 C8.2 ; R5.1 133.778,93.268 C8.2 ; C10.1 C8.2
IO4: J9.1 U2.4 | length 25.6
  Top Layer w0.8: v1(111.506,108.839) U2.4
  GND w0.8: J9.1 95.123,102.997 100.965,108.839 v1(111.506,108.839)
IO5: J9.2 U2.5 | length 26.1
  Top Layer w0.8: v1(111.506,107.569) U2.5
  GND w0.8: J9.2 94.488,100.457 101.6,107.569 v1(111.506,107.569)
IO6: J9.3 U2.6 | length 26.6
  Top Layer w0.8: v1(111.506,106.299) U2.6
  GND w0.8: J9.3 94.361,97.917 102.743,106.299 v1(111.506,106.299)
IO7: J9.4 U2.7 | length 27.1
  Top Layer w0.8: v1(111.506,105.029) U2.7
  GND w0.8: J9.4 94.054,95.377 103.706,105.029 v1(111.506,105.029)
NetA1_2: A1.2 R6.1 | length 6.6
  Bottom Layer w1: A1.2 R6.1
NetC7_1: C7.1 J8.1 R4.2 | length 5.5
  Top Layer w1: C7.1 R4.2 99.299,95.25 J8.1
NetC*1_1: C*1.1 F1.2 PS1.1 | length 12.3
  Bottom Layer w2.5: C*1.1 124.015,72.326 PS1.1 125.038,76.581 F1.2
NetD1_A: D1.A K1.COIL2 Q1.3 | length 28.4
  Bottom Layer w1.5: Q1.3 110.835,84.971 K1.COIL2 115.783,85.057 116.807,85.057 118.999,87.249 D1.A
NetJ1_1: J1.1 K1.NO | length 12.3
  Top Layer w2.5: J1.1 115.697,71.755 K1.NO
NetJ1_3: J1.3 K1.NC | length 11.6
  Top Layer w2.5: J1.3 97.536,66.61 K1.NC
NetQ1_2: Q1.2 R2.2 | length 7.5
  Top Layer w0.7: R2.2 95.167,75.819 Q1.2
NetR1_1: R1.1 U1.1 | length 3.9
  Top Layer w0.7: U1.1 89.916,89.154 90.678,89.916 R1.1
NetR2_1: R2.1 U1.3 | length 4.2
  Top Layer w0.7: U1.3 87.495,79.129 87.495,77.528 89.154,75.869 R2.1
NetU1_2: U1.2 U2.11 | length 32.9
  Top Layer w0.8: U1.2 87.476,86.968 87.476,89.889 97.025,99.438 104.825,99.438 105.336,99.949 U2.11
NOTR: C*1.2 J2.2 PS1.2 | length 28.7
  Bottom Layer w2.5: J2.2 119.126,82.423 C*1.2 124.015,83.63 PS1.2
OnOff: J8.2 U2.13 | length 13.9
  Top Layer w0.8: J8.2@104.878,95.48 J8.2 104.878,95.02 104.878,93.711 105.752,92.837 108.585,92.837 110.236,94.488 110.236,96.774 110.871,97.409 U2.13
PIR: R6.2 U2.10 | length 13.8
  Top Layer w1: v1(110.871,102.362) v1(111.506,101.727) 111.964,101.269 113.133,101.269 U2.10
  Bottom Layer w1: R6.2 105.537,107.696 v1(110.871,102.362) v1(111.506,101.727)
RX: J7.1 U2.36 | length 3.7
  Top Layer w0.8: U2.36 133.152,107.569 133.787,106.934 J7.1
SCK: J3.3 U2.20 | length 20
  Top Layer w0.7: U2.20 121.398,94.789 121.398,94.005 125.848,89.555 129.266,89.555 J3.3
SCL: J6.3 U2.32 | length 4.1
  Top Layer w0.8: U2.32 130.733,102.439 132.475,102.439 133.949,100.965 J6.3
SD: J5.1 U2.18 | length 16
  Top Layer w0.8: U2.18 118.808,94.839 118.808,93.536 121.031,91.313 121.031,90.11 J5.1
SDA: J6.4 U2.33 | length 3.5
  Top Layer w0.8: U2.33 130.733,103.709 133.908,103.709 J6.4
TX: J7.2 U2.37 | length 3.7
  Top Layer w0.8: U2.37 130.733,108.889 132.633,108.889 132.988,109.244 133.882,109.244 J7.2
WS: J3.2 U2.19 | length 20.3
  Top Layer w0.7: U2.19 120.128,94.789 120.128,93.636 123.571,90.193 v2(123.571,90.043)
  Bottom Layer w0.7: v2(123.571,90.043) 128.791,90.043 cw(c128.791,83.942) 133.107,88.254 J3.2
pads on no net: U2.8 U2.9 U2.12 U2.14 U2.15 U2.16 U2.17 U2.21 U2.22 U2.23 U2.24 U2.25 U2.26 U2.28 U2.29 U2.30 U2.31 U2.34 U2.35 U2.38 U2.39

## Silkscreen, mask and mechanical layers (free items; w line width, h text height)
Top Overlay:
  text "ELOHAB / BITIRME / ILHAN" at 91.821,63.881 h1.52 r90
  text "AKILLI EV SISTEMI" at 134.62,59.436 h1.52 r90
Bottom Overlay:
  text "ABDULLAH SERDAR İLHAN / 200207034" at 129.54,108.839 h1.52
Mechanical 13:
  lines w0.254: 84.328,64.008 89.535,58.801 136.398,58.801 136.398,78.486 137.541,79.629 137.541,79.883 137.541,89.789 136.144,91.186 136.144,114.173 113.376,114.173 90.043,114.173 84.328,108.458 84.328,99.695 84.328,64.008

## Text inside footprints (layer, text, board x,y; h text height)
U2: Mechanical 13 "ANTENNA" at 117.433,116.889 h1.27